# EAGLE board j (EAGLE 7.1.0)
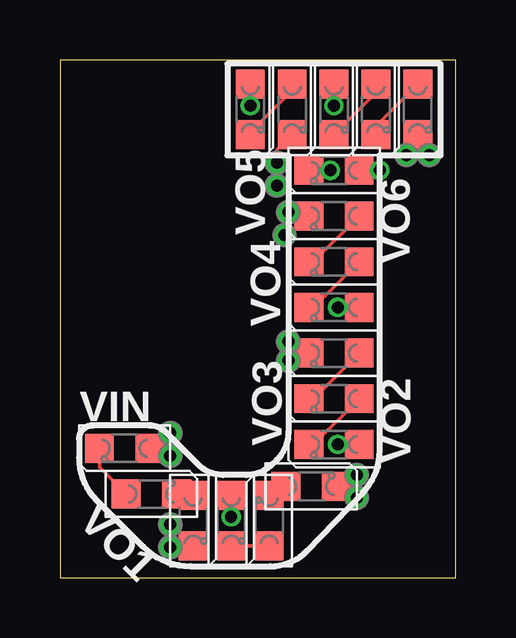
[diagram p0: board, top side]
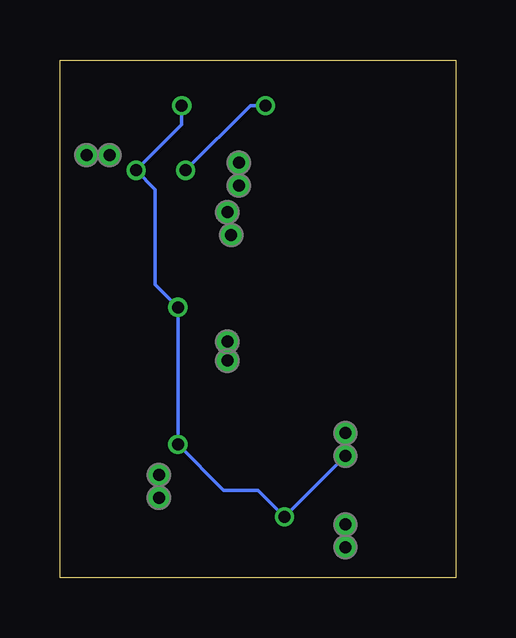
[diagram p1: board, bottom side, seen from below]

Size 16.51 x 21.59 mm. Coordinates in mm from the lower left corner, seen from the top.
Outline: 0,0 16.51,0 16.51,21.59 0,21.59 0,0
Copper layers (1*16): Top 0.035mm / dielectric 1.5mm / Bottom 0.035mm
Design rules "Fusion_eagle_rule_v1.1_tms *": minimum track width 6mil, minimum drill 12mil, track to track 6mil, track to pad 6mil, pad to pad 6mil, via to via 6mil, smd to smd 0mil, copper to edge 10mil, drill to drill 10mil, minimum pad ring 10mil, minimum via ring 6mil, stop-mask expansion 2mil, vias tented up to drill 100mil, thermal gap 10mil

## Footprints (pad centres in the part's own frame; a part is rotated, then mirrored left to right if it is on the bottom)
LED_0805 = smd 1.2 x 1.2: A 0,-1.05; C 0,1.05
P1-20 = drill 0.5: TP 0,0

## Placement (x,y rotation side)
LED1  [LED_0805]  2.7,5.4 90 top
LED2  [LED_0805]  3.81,3.49 270 top
LED3  [LED_0805]  5.56,2.38 180 top
LED4  [LED_0805]  7.14,2.38 180 top
LED5  [LED_0805]  8.73,2.38 0 top
LED6  [LED_0805]  10.48,3.81 270 top
LED7  [LED_0805]  11.43,5.56 90 top
LED8  [LED_0805]  11.43,7.46 90 top
LED9  [LED_0805]  11.43,9.37 90 top
LED10  [LED_0805]  11.43,11.27 90 top
LED11  [LED_0805]  11.43,13.18 90 top
LED12  [LED_0805]  11.43,15.08 90 top
LED13  [LED_0805]  11.43,16.99 90 top
LED14  [LED_0805]  7.94,19.53 180 top
LED15  [LED_0805]  9.68,19.53 180 top
LED16  [LED_0805]  11.43,19.53 180 top
LED17  [LED_0805]  13.18,19.53 180 top
LED18  [LED_0805]  14.92,19.53 180 top
VIN  [P1-20]  4.6,6.03 0 top
VIN1  [P1-20]  4.6,5.08 0 top
VO1  [P1-20]  4.6,2.22 0 top
VO2  [P1-20]  12.38,4.29 0 top
VO3  [P1-20]  9.53,9.05 0 top
VO4  [P1-20]  9.37,14.29 0 top
VO5  [P1-20]  9.05,17.3 0 top
VO6  [P1-20]  15.4,17.62 0 top
VO7  [P1-20]  4.6,1.27 0 top
VO8  [P1-20]  12.38,3.33 0 top
VO9  [P1-20]  9.53,9.84 0 top
VO10  [P1-20]  9.53,15.24 0 top
VO11  [P1-20]  9.05,16.35 0 top
VO12  [P1-20]  14.45,17.62 0 top

## Library data of the parts
LED1-LED18 VIN VIN1 VO1-VO12 = CyberRailGuru

## Nets
N$3: LED2.C LED3.A
N$4: LED1.C LED2.A
N$7: LED5.C LED6.A
N$8: LED4.C LED5.A
N$11: LED8.C LED9.A
N$12: LED7.C LED8.A
N$15: LED11.C LED12.A
N$16: LED10.C LED11.A
N$19: LED14.C LED15.A
N$20: LED13.C LED14.A
N$23: LED17.C LED18.A
N$24: LED16.C LED17.A
VIN: LED1.A LED4.A LED7.A LED10.A LED13.A LED16.A VIN1.TP VIN.TP
VOUT1: LED3.C VO1.TP VO7.TP
VOUT2: LED6.C VO2.TP VO8.TP
VOUT3: LED9.C VO3.TP VO9.TP
VOUT4: LED12.C VO4.TP VO10.TP
VOUT5: LED15.C VO5.TP VO11.TP
VOUT6: LED18.C VO6.TP VO12.TP

## Tracks (layer width: path | path; a pad name or v marks a point on that pad's centre or on a via)
N$3
  Top 0.152: LED2.C 5.5,3.49 LED3.A
N$4
  Top 0.152: LED1.C 1.65,4.6 LED2.A
N$7
  Top 0.152: LED5.C 9.05,3.43 LED6.A
N$8
  Top 0.152: LED4.C LED5.A
N$11
  Top 0.152: LED8.C 10.57,7.46 LED9.A
N$12
  Top 0.152: LED7.C 10.57,5.56 LED8.A
N$15
  Top 0.152: LED11.C 10.57,13.18 LED12.A
N$16
  Top 0.152: LED10.C 10.57,11.27 LED11.A
N$19
  Top 0.152: LED14.C 7.94,18.83 8.19,18.83 9.37,20 9.37,20.26 LED15.A
N$20  (via drill 0.5)
  Top 0.152: LED13.C v11.27,16.99 | v7.94,19.68 LED14.A
  Bottom 0.152: v11.27,16.99 8.57,19.68 v7.94,19.68
N$23
  Top 0.152: LED17.C 13.18,18.83 LED18.A
N$24
  Top 0.152: 11.43,18.83 LED16.C 13.18,20.22 LED17.A
VIN  (via drill 0.5)
  Top 0.152: VIN.TP 4.38,6.03 LED1.A 4.07,5.08 VIN1.TP | LED16.A v11.43,19.68 | v13.34,16.99 LED13.A | LED10.A v11.59,11.27 | LED7.A v11.59,5.56 | LED4.A v7.14,2.54
  Bottom 0.152: v11.43,19.68 11.43,18.89 v13.34,16.99 12.54,16.19 12.54,12.22 v11.59,11.27 v11.59,5.56 9.68,3.65 8.26,3.65 v7.14,2.54 VIN1.TP
VOUT1
  Top 0.152: LED3.C 5.5,1.27 VO7.TP VO1.TP
VOUT2
  Top 0.152: VO2.TP 12,4.29 LED6.C 12,3.33 VO8.TP
VOUT3
  Top 0.152: VO3.TP 10.06,9.05 LED9.C 9.9,9.84 VO9.TP
VOUT4
  Top 0.152: LED12.C 10.22,15.24 VO10.TP 9.53,14.45 VO4.TP
VOUT5
  Top 0.152: LED15.C 9.05,17.84 VO5.TP VO11.TP
VOUT6
  Top 0.152: VO12.TP 14.45,18 LED18.C 15.4,18 VO6.TP

## Text on the board
201bmp: J